# EAGLE board Topeni_Keypad (EAGLE 8.0.2)
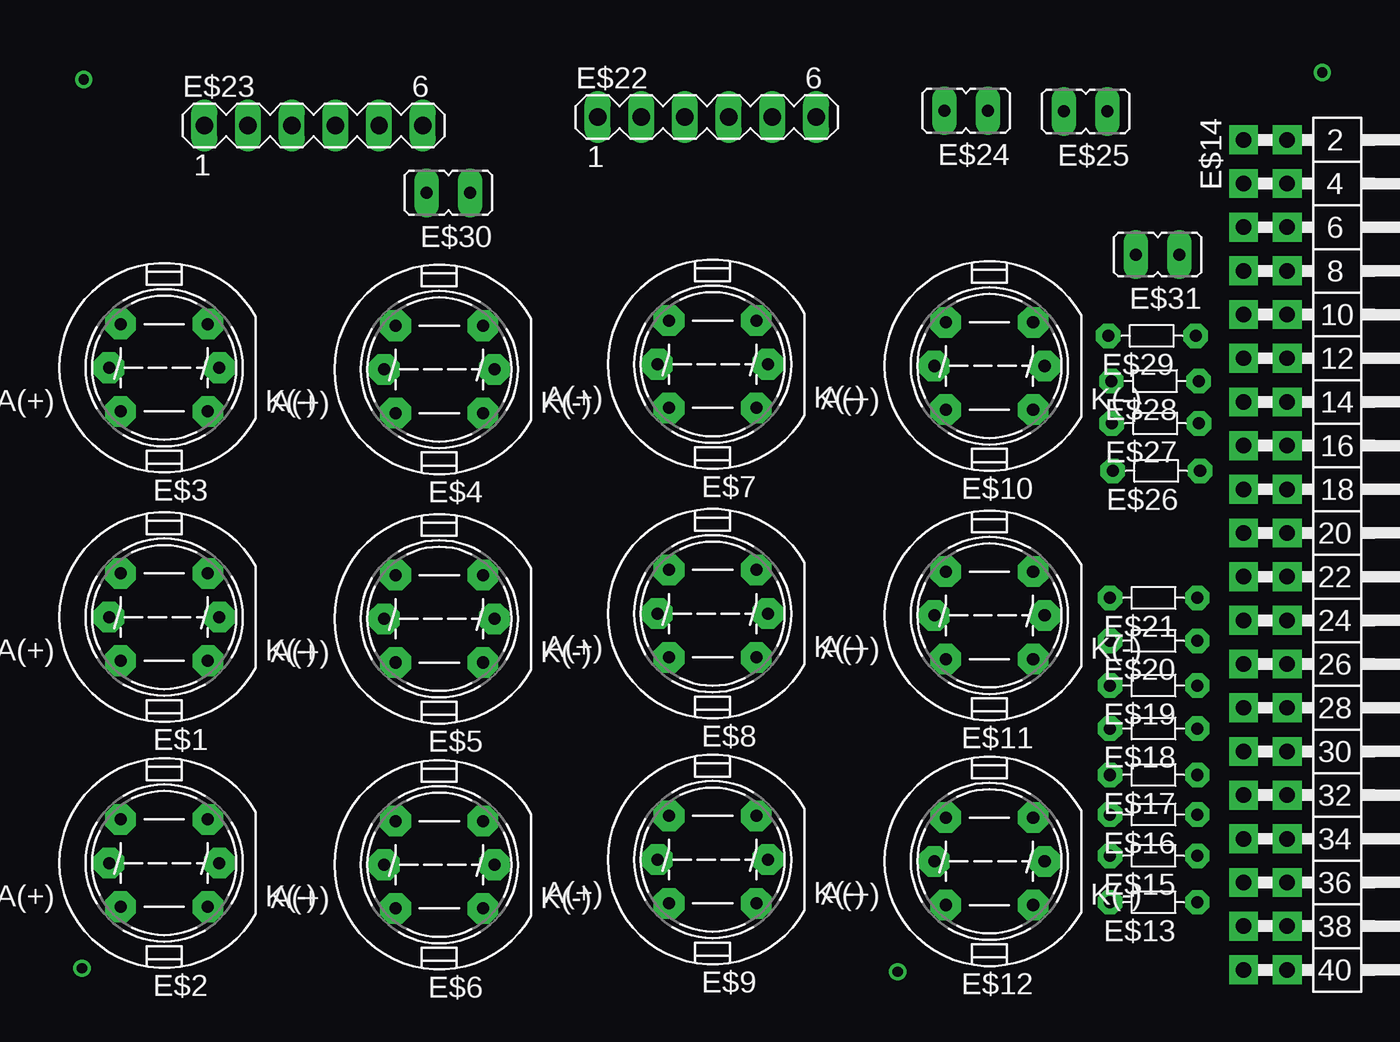
[diagram p0: board, top side]
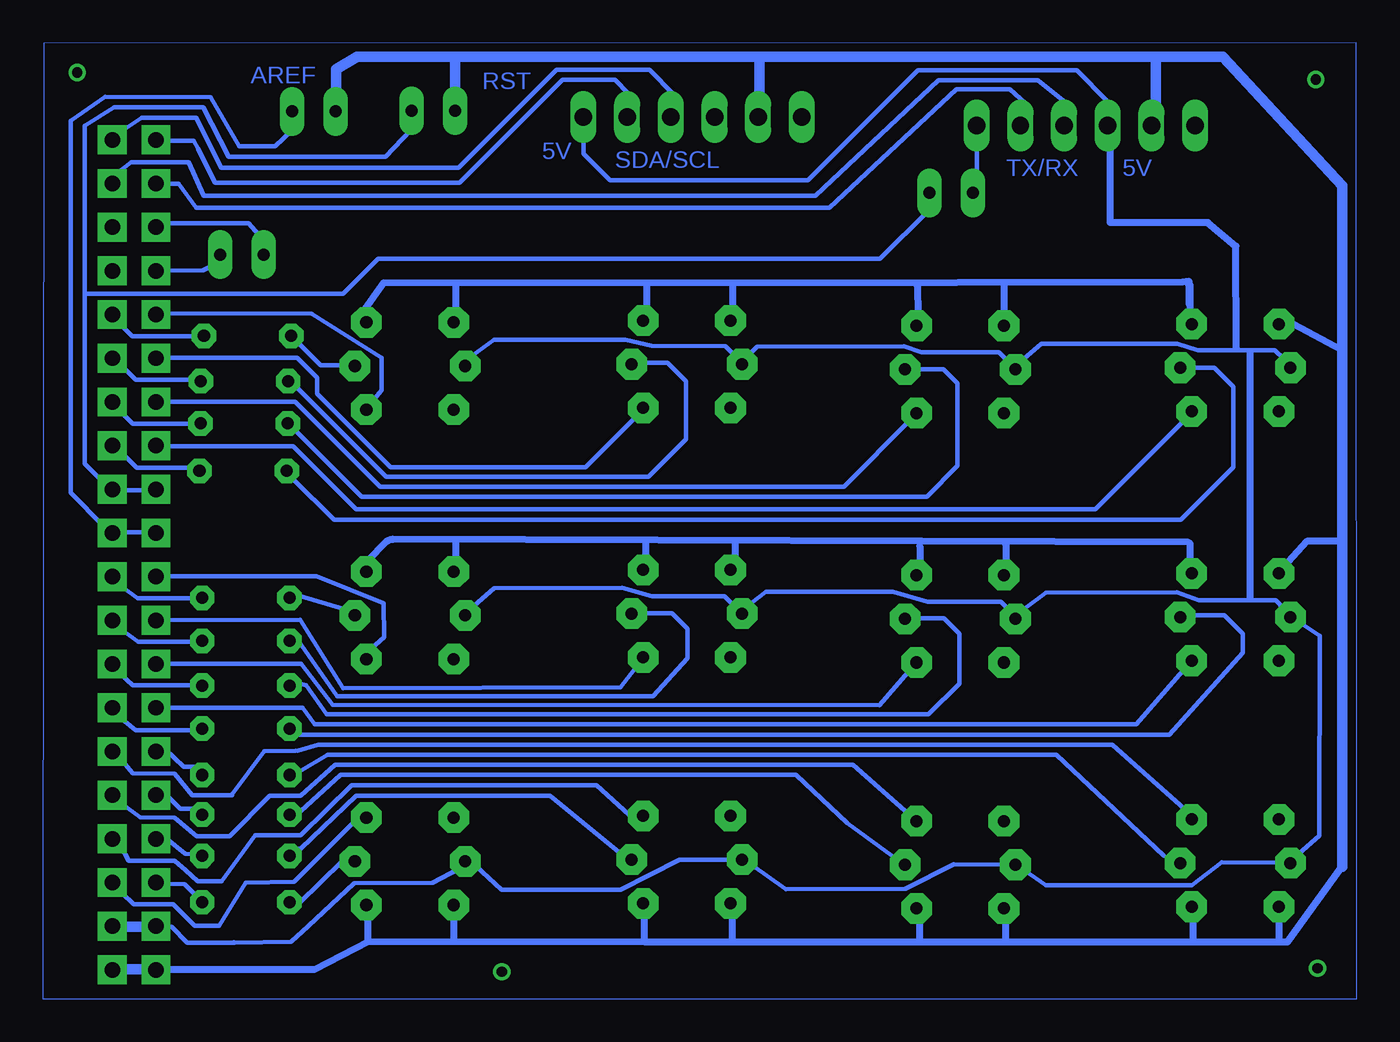
[diagram p1: board, bottom side, seen from below]

No outline drawn. Coordinates in mm, seen from the top.
Copper layers (1*16): Top 0.035mm / dielectric 1.5mm / Bottom 0.035mm
Design rules "default": minimum track width 10mil, minimum drill 24mil, track to track 8mil, track to pad 8mil, pad to pad 8mil, via to via 8mil, smd to smd 8mil, copper to edge 40mil, drill to drill 8mil, minimum pad ring 10mil, minimum via ring 8mil, stop-mask expansion 4mil, vias tented up to drill 0mil, thermal gap 10mil

## Footprints (pad centres in the part's own frame; a part is rotated, then mirrored left to right if it is on the bottom)
DT6 = drill 0.7 pad 1.778 octagon: 1 -2.54,2.54; 2 2.54,2.54; 3 2.54,-2.54; 4 -2.54,-2.54; P$1 -3.21,0; P$2 3.21,0
R-5 = drill 0.7 pad 1.422 octagon: 1 -2.54,0; 2 2.54,0
MA20-2W = drill 0.9 pad 1.676 square: 1 -24.13,-1.27; 2 -24.13,1.27; 3 -21.59,-1.27; 4 -21.59,1.27; 5 -19.05,-1.27; 6 -19.05,1.27; 7 -16.51,-1.27; 8 -16.51,1.27; 9 -13.97,-1.27; 10 -13.97,1.27; 11 -11.43,-1.27; 12 -11.43,1.27; 13 -8.89,-1.27; 14 -8.89,1.27; 15 -6.35,-1.27; 16 -6.35,1.27; 17 -3.81,-1.27; 18 -3.81,1.27; 19 -1.27,-1.27; 20 -1.27,1.27; 21 1.27,-1.27; 22 1.27,1.27; 23 3.81,-1.27; 24 3.81,1.27; 25 6.35,-1.27; 26 6.35,1.27; 27 8.89,-1.27; 28 8.89,1.27; 29 11.43,-1.27; 30 11.43,1.27; 31 13.97,-1.27; 32 13.97,1.27; 33 16.51,-1.27; 34 16.51,1.27; 35 19.05,-1.27; 36 19.05,1.27; 37 21.59,-1.27; 38 21.59,1.27; 39 24.13,-1.27; 40 24.13,1.27
MA06-1 = drill 1.016 long: 1 -6.35,0; 2 -3.81,0; 3 -1.27,0; 4 1.27,0; 5 3.81,0; 6 6.35,0
JP1Y = drill 0.7 pad 1.422 long: 1 0,-1.27; 2 0,1.27

## Placement (x,y rotation side)
E$1  [DT6]  28.35,22.08 180 top
E$2  [DT6]  28.35,7.78 180 top
E$3  [DT6]  28.35,36.58 180 top
E$4  [DT6]  44.35,36.48 180 top
E$5  [DT6]  44.35,21.98 180 top
E$6  [DT6]  44.35,7.68 180 top
E$7  [DT6]  60.25,36.78 180 top
E$8  [DT6]  60.25,22.28 180 top
E$9  [DT6]  60.25,7.98 180 top
E$10  [DT6]  76.35,36.68 180 top
E$11  [DT6]  76.35,22.18 180 top
E$12  [DT6]  76.35,7.88 180 top
E$13  [R-5]  85.9,5.5 180 top
E$14  [MA20-2W]  92.4,25.7 270 top
E$15  [R-5]  85.9,8.2 180 top
E$16  [R-5]  85.9,10.6 180 top
E$17  [R-5]  85.9,12.9 180 top
E$18  [R-5]  85.9,15.6 180 top
E$19  [R-5]  85.9,18.1 180 top
E$20  [R-5]  85.9,20.7 180 top
E$21  [R-5]  85.9,23.2 180 top
E$22  [MA06-1]  59.91,51.15 0 top
E$23  [MA06-1]  37.04,50.66 0 top
E$24  [JP1Y]  74.99,51.52 90 top
E$25  [JP1Y]  81.95,51.48 90 top
E$26  [R-5]  86.06,30.58 180 top
E$27  [R-5]  86,33.34 180 top
E$28  [R-5]  85.98,35.8 180 top
E$29  [R-5]  85.8,38.43 180 top
E$30  [JP1Y]  44.88,46.75 90 top
E$31  [JP1Y]  86.13,43.16 90 top

## Library data of the parts
E$1-E$12 = switch-misc
E$13 E$15-E$21 E$26-E$29 = discrete
E$14 E$22 E$23 = con-lstb
E$24 E$25 E$30 E$31 = jumper

## Tracks (layer width: path | path; a pad name or v marks a point on that pad's centre or on a via)
S$1
  Bottom 0.406: 31.03,40.28 31.03,41.6 31.43,41.56 57.6,41.5 | 57.6,41.5 77.9,41.51 79.12,39.81 | 57.6,41.5 57.6,39.9
S$2
  Bottom 0.406: 93.1,4.1 91.7,4.1 91.7,4.2
S$3
  Bottom 0.406: 90.7,1.6 81.9,1.6 78.77,3.22 62.7,3.2 | 62.7,3.2 57.6,3.2 | 57.6,3.2 46.7,3.2 | 46.7,3.2 25.8,3.2 | 25.8,3.2 25.3,3.2 22.2,7.5 22.17,37.59 24.98,39.11 | 25.8,3.2 25.8,4.6 25.9,4.7 | 46.7,3.2 46.7,4.6 | 57.6,3.2 57.6,4.7 57.7,4.8 | 62.7,3.2 62.7,4.7 62.99,4.89
S$4
  Bottom 0.406: 30.8,3.4 30.8,4.9
S$5
  Bottom 0.406: 41.7,3.4 41.7,4.5 41.8,4.6
S$6
  Bottom 0.406: 73.8,3.3 73.8,4.7 74.17,4.86
S$7
  Bottom 0.406: 78.8,3.3 78.8,4.4 78.99,4.8
S$8
  Bottom 0.254: 72.55,7.63 71.02,6.24 64.1,6.24 60.67,7.96 57.71,7.97
S$9
  Bottom 0.254: 56.5,7.67 54.48,6.27 47.53,6.28 44.71,7.7 41.75,7.69
S$10
  Bottom 0.254: 40.63,7.36 39.38,6.5 30.87,6.5 29.14,7.82 25.74,7.8
S$11
  Bottom 0.254: 24.67,8.33 23.47,9.37 23.44,21 24.53,21.71 24.59,22.25
S$12
  Bottom 0.406: 31.13,26.44 77.34,26.6 arc-45 77.79,26.41 78.8,25.4
S$13
  Bottom 0.406: 73.7,26.5 73.7,25.54 arc-45 73.6,25.3
S$14
  Bottom 0.254: 25.52,22.58 25.99,23.05 30.46,23.05 31.76,23.52 39.38,23.5 40.63,22.56 40.63,22.22
S$15
  Bottom 0.406: 57.45,26.51 57.45,25.31
S$16
  Bottom 0.406: 62.66,26.51 62.66,25.41
S$17
  Bottom 0.254: 41.51,22.5 41.98,22.97 46.26,22.97 48.26,23.55 55.64,23.55 56.53,22.88 56.53,22.48
S$18
  Bottom 0.406: 41.7,26.3 41.7,25.1
S$19
  Bottom 0.406: 46.7,26.2 46.7,25.1
S$20
  Bottom 0.254: 57.49,22.7 58.07,23.28 62.29,23.29 64.03,23.79 71.47,23.76 72.62,22.73 72.7,22.46
S$21
  Bottom 0.406: 31,26.4 31,25.1
S$22  (via drill 0.6)
  other vias: 95.71,53.75
S$23
  Bottom 0.254: 73.5,7.46 75.04,6.64 79.59,6.61 82.27,4.1 83.26,3.2 86.56,3.14 86.59,3.18 86.63,3.16 89.3,3.15 90.21,4.08 90.59,4.12
S$24  (via drill 0.6)
  other vias: 23.67,53.34
S$25
  Bottom 0.254: 25.52,37.11 26.06,37.6 30.53,37.6 31.73,37.97 39.64,37.97 40.86,36.92
S$26
  Bottom 0.406: 73.7,41.3 73.7,39.9
S$27
  Bottom 0.254: 41.51,36.89 42.09,37.47 46.61,37.48 47.62,37.83 56.16,37.81 56.76,37.21
S$28
  Bottom 0.406: 62.6,41.4 62.6,39.9
S$29
  Bottom 0.254: 57.42,37.24 58,37.82 62.3,37.85 63.83,38.2 71.45,38.21 72.73,37.28 72.83,37.07
S$30
  Bottom 0.406: 41.8,41.38 41.8,39.5
S$31
  Bottom 0.406: 46.85,41.32 46.8,39.7
S$32
  Bottom 0: 21.3,-0.1 21.31,55.46 97.66,55.44 97.7,-0.1 21.3,-0.1
S$33
  Bottom 0.254: 90.66,6.58 89.45,6.56 88.81,5.9
S$34
  Bottom 0.254: 90.5,9.2 89.43,8.31 89,8.29
S$35
  Bottom 0.254: 90.56,11.77 89.73,10.94 88.75,10.93
S$36
  Bottom 0.254: 90.61,14.43 89.53,13.38 88.83,13.37
S$37
  Bottom 0.254: 82.79,5.45 80.29,7.89
S$38
  Bottom 0.254: 93.18,6.4 93.1,6.02 92.43,5.37 90.12,5.39 88.89,4.13 87.46,4.14 85.91,6.64 83.1,6.7 79.5,10.3
S$39
  Bottom 0.254: 83,8.6 82.7,8.6 79.5,11.7 68.2,11.7 64.05,8.3
S$40
  Bottom 0.254: 93.14,8.72 92.7,7.91 90.04,7.91 89.41,7.36 88.7,6.73 87.32,6.73 85.37,9.39 82.7,9.4 79.74,12.3 65.5,12.3 63.6,10.6
S$41
  Bottom 0.254: 82.7,10.8 80.4,12.9 53.9,12.9 50.9,10.1 48.01,7.97
S$42
  Bottom 0.254: 93.12,11.22 92.04,10.43 90.03,10.41 88.77,9.33 86.87,9.35 86.85,9.35 84.52,11.68 82.7,11.7 80.7,13.5 50.6,13.5 47.3,10.6
S$43
  Bottom 0.254: 82.8,13.1 81.15,14.09 38.75,14.09 32.5,8.2
S$44
  Bottom 0.254: 82.9,14.3 81.7,14.67 35.5,14.67 31.3,10.9 31.2,10.9
S$45
  Bottom 0.254: 90.51,16.8 82.6,16.8 81.9,15.84 34.1,15.84 31.2,19.2
S$46
  Bottom 0.254: 82.84,18.23 82.4,18.13 81.21,16.43 46.2,16.42 44.4,18.2 44.4,21.1 45.3,22 47.4,22 47.5,21.9
S$47
  Bottom 0.254: 90.56,19.36 82.68,19.38 80.85,16.97 49.05,16.96 47.2,19.1
S$48
  Bottom 0.254: 82.88,20.75 80.6,17.47 62.23,17.47 60.2,19.7 60.2,21.4 61.1,22.3 63.5,22.3
S$49
  Bottom 0.254: 86.7,11.79 84.84,14.29 83,14.3
S$50
  Bottom 0.254: 93.26,16.29 92.31,15.51 88.9,15.51
S$51
  Bottom 0.254: 93.22,18.79 92.48,18.12 88.99,18.12
S$52
  Bottom 0.254: 93.21,21.4 92.16,20.65 89.1,20.65
S$53
  Bottom 0.254: 93.25,23.94 92.19,23.19 89.03,23.19
S$54
  Bottom 0.254: 82.97,15.25 32.2,15.25 27.9,20 27.9,21.1 29,22.2 31.4,22.2 31.5,22.1
S$55
  Bottom 0.254: 90.55,21.91 82.74,21.92 80.23,17.94 64.12,17.99 63.1,19.3
S$56
  Bottom 0.254: 82.81,23.33 80.15,22.53
S$57
  Bottom 0.254: 90.47,24.46 81.79,24.46 77.9,22.88 77.85,20.9 78.6,20.25
S$58
  Bottom 0.61: 93.14,4.09 91.84,4.09
S$59
  Bottom 0.61: 93.32,1.6 91.96,1.6
S$60
  Bottom 0.61: 22.14,7.57 22.13,47.15 29.07,54.65 79.42,54.67 80.66,53.92 80.65,52.57
S$61
  Bottom 0.61: 32.96,54.31 32.96,51.51
S$62
  Bottom 0.254: 93.22,29.46 91.7,29.46
S$63
  Bottom 0.254: 93.22,31.72 92.24,30.76 89.28,30.76
S$64
  Bottom 0.254: 93.3,27 91.53,27
S$65
  Bottom 0.406: 25.31,25.26 24.2,26.49 22.27,26.5
S$66
  Bottom 0.254: 93.35,34.19 92.48,33.32 89.07,33.32
S$67
  Bottom 0.254: 93.31,36.86 92.32,35.87 88.79,35.87
S$68
  Bottom 0.254: 93.47,39.37 92.52,38.42 88.95,38.42
S$69
  Bottom 0.254: 83.2,30.16 80.78,27.74 31.51,27.74 28.47,30.78 28.47,35.46 29.58,36.57 31.64,36.57
S$70
  Bottom 0.254: 90.59,32.01 83.16,32.01 79.5,28.35 36.49,28.35 31.27,33.57
S$71
  Bottom 0.254: 82.99,32.91 79.17,29.09 46.3,29.09 44.5,30.89 44.5,35.67 45.32,36.49 47.74,36.49
S$72
  Bottom 0.254: 90.55,34.6 83.03,34.6 78.1,29.67 51.11,29.67 47.21,33.57
S$73
  Bottom 0.254: 83.12,35.63 77.73,30.24 62.49,30.24 60.31,32.42 60.31,35.79 61.38,36.86 63.52,36.86
S$74
  Bottom 0.254: 90.59,37.15 82.91,37.15 81.76,36 81.76,35.08 77.49,30.78 66.15,30.78 63.15,33.78
S$75
  Bottom 0.254: 82.87,38.02 81.56,36.71 80.16,36.71
S$76
  Bottom 0.254: 90.66,39.74 82.08,39.72 78.01,37.17 78.01,35.27 78.59,34.58
S$77
  Bottom 0.254: 94.16,29.9 95.26,31 95.26,50.64 93.57,51.71 88.37,51.71 86.89,48.84 77.76,48.84 76.32,50.39 76.27,50.51
S$78
  Bottom 0.254: 94.16,27.36 96.1,29.3 96.09,50.94 94.09,52.33 87.94,52.31 86.3,49.47 84.19,49.45 83.24,50.36 83.22,50.52
S$79
  Bottom 0.61: 56.04,54.66 56.04,52.49
S$80
  Bottom 0.61: 73.72,54.57 73.72,52.49
S$81
  Bottom 0.254: 93.27,50.23 91.95,51.11 88.79,51.11 87.34,48.2 73.53,48.2 67.83,53.9 62.43,53.9 60.99,52.46
S$82
  Bottom 0.254: 90.51,49.77 88.94,49.77 88.67,49.3 88.41,48.77 87.69,47.32 73.47,47.32 67.48,53.31 64.42,53.31 63.63,52.52
S$83
  Bottom 0.254: 93.56,47.76 92.58,48.54 89.24,48.54 88.36,46.57 52.77,46.59 45.61,53.3 39.83,53.3 38.21,51.99
S$84
  Bottom 0.254: 90.41,47.29 89.82,47.29 88.79,45.88 51.97,45.88 44.58,52.76 41.46,52.76 40.57,51.95
S$85
  Bottom 0.254: 35.79,52.08 37.58,53.87 46.82,53.87 53.22,47.47 64.72,47.47 66.27,49.02 66.27,50.07
S$86
  Bottom 0.406: 28.29,37.7 28.31,43.65 29.94,45.01 35.63,45.01 35.63,49.45
S$87
  Bottom 0.254: 95.21,40.87 80.25,40.87 78.21,42.91 49.01,42.91 46.18,45.74
S$88
  Bottom 0.254: 43.37,47.84 43.37,49.7 43.41,49.74
S$89
  Bottom 0.254: 90.64,42.23 88.37,42.26 87.65,42.6
S$90
  Bottom 0.254: 90.5,44.97 85.73,44.97 84.95,44.09
S$91  (via drill 0.6)
  other vias: 23.56,1.66
S$92
  Bottom 0.406: 30.98,39.78 30.98,41.38 31.07,41.38
S$93  (via drill 0.6)
  other vias: 71.01,1.46
S$94
  Bottom 0.406: 27.47,23.12 27.48,37.5
S$95
  Bottom 0.254: 93.22,13.87 92.47,13 90.03,12.98 89.01,11.72 86.71,11.72

## Text on the board
Bottom: RST | AREF | 5V | 5V | TX/RX | SDA/SCL